# EAGLE board 000044 XXX Rev 1.00 - Copy (EAGLE 9.6.2)
DATE: 01.07.2020; OWNER: Kallio Designs; PCB_PN: XXXX; REVISION: 1.0

Size 241.2 x 80 mm. Coordinates in mm from the lower left corner, seen from the top.
Outline: 0,0 100,0 100,80 0,80 0,0
Outline: 131.2,28.9 241.2,28.9 241.2,1.9 131.2,1.9 131.2,28.9
Copper layers (1+2*15+16): Top 0.035mm / dielectric 0.2mm / Route2 0.035mm / dielectric 1.3mm / Route15 0.035mm / dielectric 0.2mm / Bottom 0.035mm
Design rules "KD_rules_fine_4-layer": minimum track width 0.15mm, minimum drill 0.5mm, track to track 6mil, track to pad 6mil, pad to pad 6mil, via to via 6mil, smd to smd 0mil, copper to edge 10mil, drill to drill 10mil, minimum pad ring 0.2mm, minimum via ring 0.2mm, stop-mask expansion 2mil, vias tented up to drill 100mil, thermal gap 10mil
Net classes: 1 100V/1A: width 0.5 mm, drill 0.9 mm; 2 Analog: clearance 0.25 mm; 3 Serial: clearance 0.25 mm
Milling: area 98.5,94.7 to 100,95.3; area 0,94.7 to 1.5,95.3; area 48.8,93.6 to 51.2,94.6; area 114.7,0 to 115.3,1.5; area 114.7,78.5 to 115.3,80; area 113.6,39.2 to 114.6,40.8; 69 lines

## Footprints (pad centres in the part's own frame; a part is rotated, then mirrored left to right if it is on the bottom)
MTG_NP_M2_220X420 = hole 2.2: 0,0
MTG_PTH_M3_320X600 = drill 3.2 pad 6: 1 0,0
MTG_NP_M3_320X600 = hole 3.2: 0,0
TEST_POINT_2.5MM = smd 2.5 x 2.5: P$1 0,0
PAD_GND_HOOK_M = drill 1.2 pad 1.8 octagon: P$1 -5,0; P$2 5,0

## Placement (x,y rotation side)
ART1  ART_QC  [ART_QC_BIG]  -32,-29 0 top  (outside the outline)
ART2  ART_SN_LABEL-08X24  [ART_SN_8X24]  -38,-52 0 top  (outside the outline)
FIDUCIAL1  FIDUCIAL  [FIDUCIAL]  -13.97,27.94 0 top  (outside the outline)
FIDUCIAL2  FIDUCIAL  [FIDUCIAL]  -16.51,27.94 0 top  (outside the outline)
FIDUCIAL3  FIDUCIAL  [FIDUCIAL]  -19.05,27.94 0 top  (outside the outline)
FIDUCIAL4  FIDUCIAL  [FIDUCIAL]  -21.59,27.94 0 top  (outside the outline)
FIDUCIAL5  FIDUCIAL  [FIDUCIAL]  -24.13,27.94 0 top  (outside the outline)
FIDUCIAL6  FIDUCIAL  [FIDUCIAL]  -26.67,27.94 0 top  (outside the outline)
LAYER1  ART_LAYER_MARKING-4LAYER  [ART_4LAYER]  -36,-54 0 top  (outside the outline)
LOGO2  ART_LOGO_TEXT_2.5MM-SILK  [ART_LOGO_TEXT_2.5MM_SILK]  -24.13,20.32 0 top  (outside the outline)
LOGO3  ART_LOGO_TEXT_2.5MM-MASK  [ART_LOGO_TEXT_2.5MM_MASK]  -24.13,24.13 0 top  (outside the outline)
MTG1  HOL_2.2/4.2_NP  [MTG_NP_M2_220X420]  -33,-6 0 top  (outside the outline)
MTG2  HOL_2.2/4.2_NP  [MTG_NP_M2_220X420]  -33,-11 0 top  (outside the outline)
MTG3  HOL_2.2/4.2_NP  [MTG_NP_M2_220X420]  -33,-16 0 top  (outside the outline)
MTG4  HOL_3.2/6.0_PTH-3.2/6.0_PTH  [MTG_PTH_M3_320X600]  -16.51,3.81 0 top  (outside the outline)
MTG5  HOL_3.2/6.0_NP  [MTG_NP_M3_320X600]  -22.86,3.81 0 top  (outside the outline)
MTG6  HOL_3.2/6.0_NP  [MTG_NP_M3_320X600]  -29.21,3.81 0 top  (outside the outline)
MTG7  HOL_2.2/4.2_NP  [MTG_NP_M2_220X420]  -33,-21 0 top  (outside the outline)
TP1  PAD_TEST_POINT-2.5MM  [TEST_POINT_2.5MM]  -37,-36 0 top  (outside the outline)
TP2  PAD_TEST_POINT-2.5MM  [TEST_POINT_2.5MM]  -37,-39 0 top  (outside the outline)
TP3  PAD_TEST_POINT-2.5MM  [TEST_POINT_2.5MM]  -37,-42 0 top  (outside the outline)
X1  PAD_TEST_GROUND_HOOK  [PAD_GND_HOOK_M]  -29,-2 0 top  (outside the outline)

## Library data of the parts
ART1 = Custom_Eagle_KD; CODE: QC sticker; DNP: T; MANUFACTURER: DNP; MFG_PARTNO: DNP; PRICE: 0; SUPPLIER: Digi-Key; SUPPLIER_PARTNO: DNP
ART2 = Custom_Eagle_KD; CODE: SN Label; DNP: T; MANUFACTURER: DNP; MFG_PARTNO: DNP; PRICE: 0; SUPPLIER: Digi-Key; SUPPLIER_PARTNO: DNP
FIDUCIAL1-FIDUCIAL6 = Custom_Eagle_KD; CODE: FIDUCIAL; DNP: T; MANUFACTURER: DNP; MFG_PARTNO: DNP; SUPPLIER: DNP; SUPPLIER_PARTNO: DNP
LAYER1 = Custom_Eagle_KD; CODE: 4 Layer; DNP: T; MANUFACTURER: DNP; MFG_PARTNO: DNP; PRICE: DNP; SUPPLIER: DNP; SUPPLIER_PARTNO: DNP
LOGO2 = Custom_Eagle_KD; CODE: Logo text 2.5mm silk; DNP: T; MANUFACTURER: DNP; MFG_PARTNO: DNP; PRICE: 0; SUPPLIER: DNP; SUPPLIER_PARTNO: DNP
LOGO3 = Custom_Eagle_KD; CODE: Logo text 2.5 mm mask; DNP: T; MANUFACTURER: DNP; MFG_PARTNO: DNP; PRICE: 0; SUPPLIER: DNP; SUPPLIER_PARTNO: DNP
MTG1-MTG3 MTG7 = Custom_Eagle_KD; CODE: NP 2.2 mm; DNP: T; MANUFACTURER: DNP; MFG_PARTNO: DNP; PRICE: DNP; SUPPLIER: DNP; SUPPLIER_PARTNO: DNP
MTG4 = Custom_Eagle_KD; CODE: 3.2/6.0mm; DNP: T; MANUFACTURER: DNP; MFG_PARTNO: DNP; SUPPLIER: DNP; SUPPLIER_PARTNO: DNP
MTG5 MTG6 = Custom_Eagle_KD; CODE: NP 3.2 mm; DNP: T; MANUFACTURER: DNP; MFG_PARTNO: DNP; PRICE: DNP; SUPPLIER: DNP; SUPPLIER_PARTNO: DNP
TP1-TP3 = Custom_Eagle_KD; CODE: DNP; DNP: T; INFO: Edit "INFO" attribute; MANUFACTURER: Do not populate; MFG_PARTNO: DNP; SUPPLIER: DNP; SUPPLIER_PARTNO: DNP
X1 = Custom_Eagle_KD; CODE: DNP; DNP: T; MANUFACTURER: Do not populate; MFG_PARTNO: DNP; PRICE: 0; SUPPLIER: DNP; SUPPLIER_PARTNO: DNP

## Nets
GND [100V/1A]: MTG4.1 X1.P$1 X1.P$2

## Tracks (layer width: path | path; a pad name or v marks a point on that pad's centre or on a via)
GND  (2 unrouted)

## Text on the board
Top: L1 TOP LAYER
Route2: L2 mid-layer
Route15: L3 mid-layer
Bottom: L4 BOTTOM LAYER
Dimension: PN: | PCB Rev:
tPlace: | | Silkscreen top
bPlace: Silkscreen bottom
tStop: Soldermask top
bStop: Soldermask bottom
tCream: Paste mask top
bCream: Paste mask bottom
Drills: Drill drawing
Milling: Drill tolerance < 2 mm drill | +/- 0.1 mm | Drill tolerance > 2 mm drill | +/- 10 % | General tolerances | IPC | Soldermask color | Order form | Silkscreen color | Order form | PCB Material | FR4 | Surface finish | HASL | PCB Final thickness (without mask) | 1.6 mm | PCB Build up: | L1: Top | Copper 35 um +/-10 % | Pregrep 200 um +/-5 % | L2: Mid | Copper 18 um +/-10 % | FR4 core 1000 um +/-10 % | L3: Mid | Copper 18 um +/-10 % | Pregrep 200 um +/-10 % | L4: Bottom | Copper 35 um +/-10 % | Drill drawing